# Altium PCB Output.PcbDoc
Units mil, origin at the board's own origin, x right, y up, seen from the top; angles counter-clockwise.
Board outline 6299.21 x 3937.01 mil, 2 copper layers (Top Layer, Bottom Layer); 99 components, 62 nets, 304 pads, 98 vias.
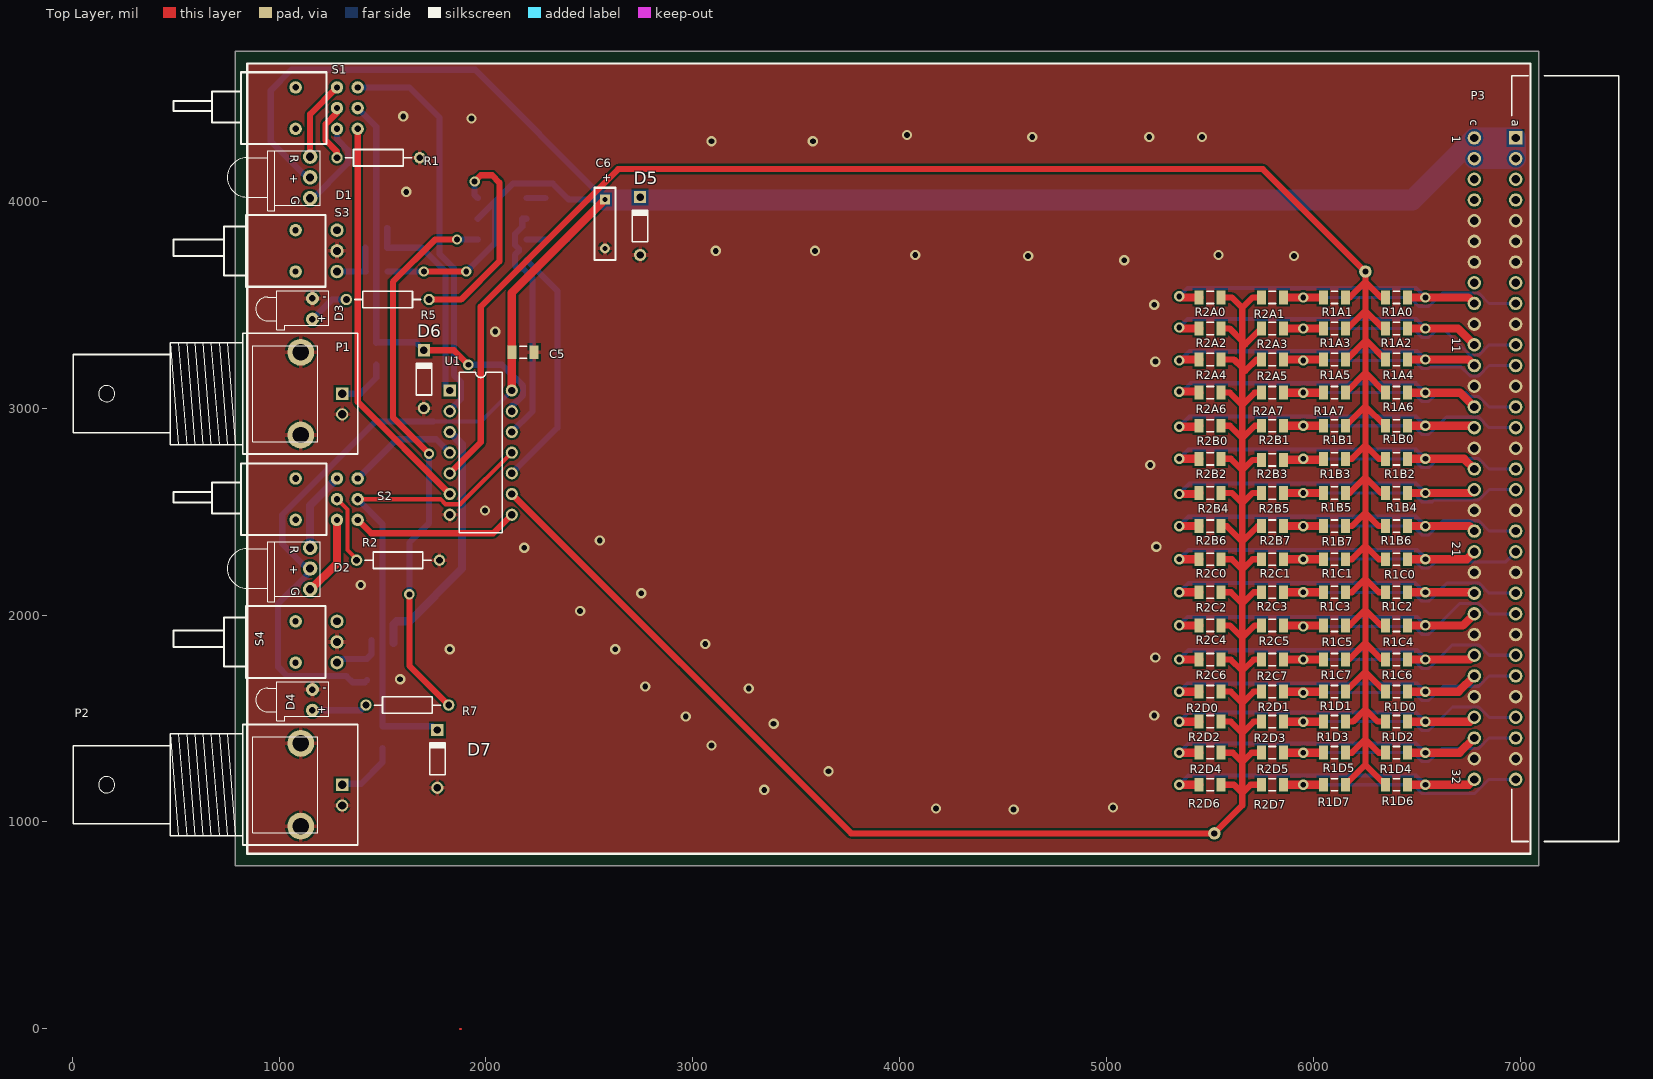
[diagram p0: Top Layer view]
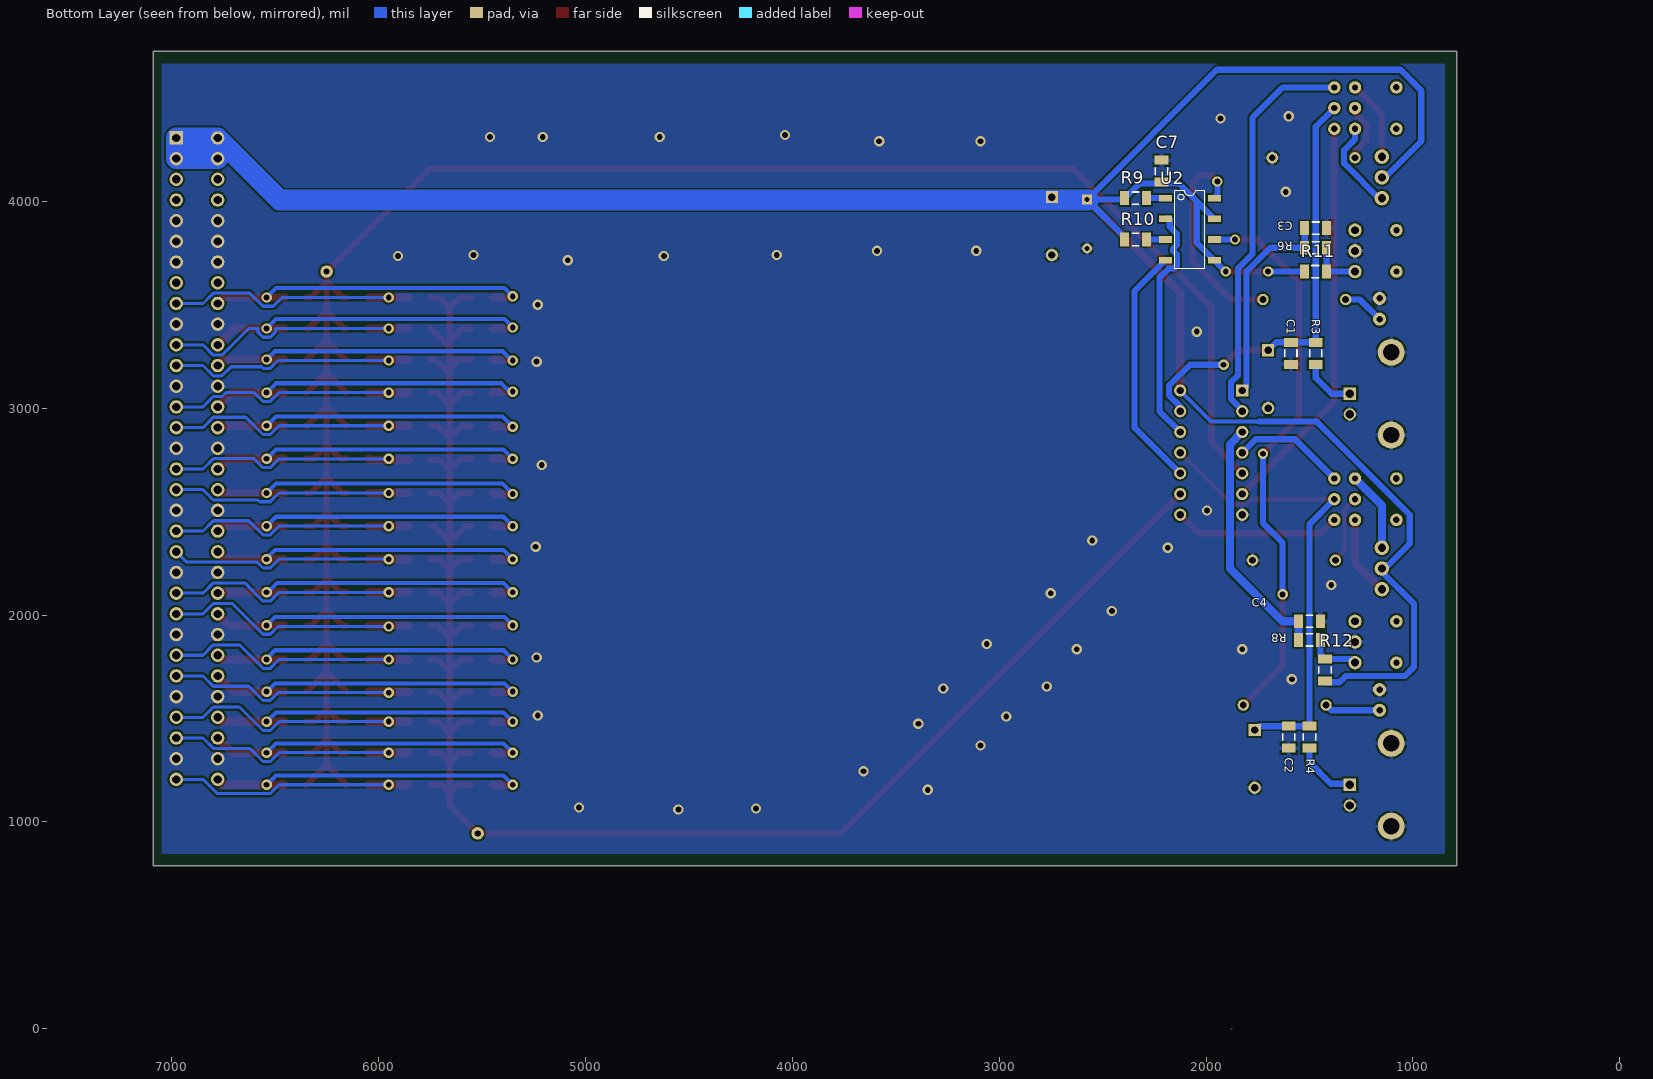
[diagram p1: Bottom Layer view, seen from below]

## Layer stack, top to bottom
Top Solder: solder mask 0.4, Solder Resist, Dk 3.5
Top Layer: signal copper 1.4
Dielectric1: dielectric 12.6, FR-4, Dk 4.8
Bottom Layer: signal copper 1.4
Bottom Solder: solder mask 0.4, Solder Resist, Dk 3.5

## Board outline
787.4,787.4 7086.61,787.4 7086.61,4724.41 787.4,4724.41

## Design rules (kind name [scope] priority, off if disabled: settings)
Clearance [All] p1: gap=10 ignorepadtopadclearanceinfootprint=FALSE except(0: Arc-Hole Track-Hole SMDPad-Hole THPad-Hole Via-Hole Fill-Hole Poly-Hole Region-Hole Text-Hole)
PlaneConnect PlaneConnect_1 [All] p1: planeconnectstyle=Relief reliefexpansion=20 reliefentries=4 reliefconductorwidth=10 reliefairgap=10
PolygonConnect PolygonConnect_1 [All vs (InComponent('P3') OR ISVia)] p1: connectstyle=Direct reliefconductorwidth=10 reliefentries=4 polygonreliefangle="90 Angle" airgapwidth=10
PolygonConnect [All] p2: connectstyle=Relief reliefconductorwidth=20 reliefentries=4 polygonreliefangle="90 Angle" airgapwidth=10
RoutingVias [All] p1: holewidth=28 width=50 viastyle="Through Hole" minholewidth=28 minwidth=50 maxholewidth=28 maxwidth=50
SilkToSolderMaskClearance SilkscreenOverComponentPads [IsPad] p1: minsilkscreentomaskgap=10 clearancetoexposedcopper=TRUE
SolderMaskExpansion [All] p1: expansion=4 istentingtop=FALSE
Width [All] p1: maxlimit=100 minlimit=10 preferedwidth=30
28 further rules are at their usual default settings.

## Components (designator, comment, footprint, x,y, rotation, side; value= is the part's Value field where it differs from the comment)
C1 "Cap Semi" C1206 1590,3265 r270 bottom value=100pF
C2 "Cap Semi" C1206 1600,1410 r270 bottom value=100pF
C3 "Cap Semi" C1206 1470,3870 r0 bottom value=100nF
C4 "Cap Semi" C1206 1500,1970 r0 bottom value=100nF
C5 "Cap Semi" C1206 2180,3270 r180 top value=100nF
C6 "Cap Pol1" Captantalum 2575,3890 r90 top value=10uF
C7 "Cap Semi" C1206 2215,4145 r270 bottom value=100nF
D1 "MV5439A" "Double LED" 1150,4115 r270 top
D2 "MV5439A" "Double LED" 1150,2225 r270 top
D3 "HLMP-EJ30-NR0DD" LED-A 1161.42,3480 r180 top
D4 "HLMP-EJ30-NR0DD" LED-A 1161.42,1590 r180 top
D5 "Zener Diode BZX79C5V6" DO-35 2745,3880 r90 top
D6 "Zener Diode BZX79C5V6" DO-35 1700,3140 r90 top
D7 "Zener Diode BZX79C5V6" DO-35 1765,1305 r90 top
P1 "BNC" "BNC_RA CON" 1305,3070 r0 top
P2 "BNC" "BNC_RA CON" 1305,1180 r0 top
P3 "HARTING 09031642921" EURO2.54-2H64-NH 7185.04,2755.91 r270 top
R1 "Res1" AXIAL-0.4 1480,4210 r180 top value=150
R1A0 "Res1" C1206 6400,3535 r180 top value=0
R1A1 "Res1" C1206 6100,3535 r180 top value=0
R1A2 "Res1" C1206 6400,3385 r180 top value=0
R1A3 "Res1" C1206 6100,3385 r180 top value=0
R1A4 "Res1" C1206 6400,3235 r180 top value=0
R1A5 "Res1" C1206 6100,3235 r180 top value=0
R1A6 "Res1" C1206 6400,3075 r180 top value=0
R1A7 "Res1" C1206 6100,3075 r180 top value=0
R1B0 "Res1" C1206 6400,2915 r180 top value=0
R1B1 "Res1" C1206 6100,2915 r180 top value=0
R1B2 "Res1" C1206 6400,2755 r180 top value=0
R1B3 "Res1" C1206 6100,2755 r180 top value=0
R1B4 "Res1" C1206 6400,2590 r180 top value=0
R1B5 "Res1" C1206 6100,2590 r180 top value=0
R1B6 "Res1" C1206 6400,2430 r180 top value=0
R1B7 "Res1" C1206 6100,2430 r180 top value=0
R1C0 "Res1" C1206 6400,2270 r180 top value=0
R1C1 "Res1" C1206 6100,2270 r180 top value=0
R1C2 "Res1" C1206 6400,2110 r180 top value=0
R1C3 "Res1" C1206 6100,2110 r180 top value=0
R1C4 "Res1" C1206 6400,1950 r180 top value=0
R1C5 "Res1" C1206 6100,1950 r180 top value=0
R1C6 "Res1" C1206 6400,1785 r180 top value=0
R1C7 "Res1" C1206 6100,1785 r180 top value=0
R1D0 "Res1" C1206 6400,1630 r180 top value=0
R1D1 "Res1" C1206 6100,1630 r180 top value=0
R1D2 "Res1" C1206 6400,1485 r180 top value=0
R1D3 "Res1" C1206 6100,1485 r180 top value=0
R1D4 "Res1" C1206 6400,1335 r180 top value=0
R1D5 "Res1" C1206 6100,1335 r180 top value=0
R1D6 "Res1" C1206 6400,1180 r180 top value=0
R1D7 "Res1" C1206 6100,1180 r180 top value=0
R2 "Res1" AXIAL-0.4 1575,2265 r180 top value=150
R2A0 "Res1" C1206 5500,3535 r0 top value=0
R2A1 "Res1" C1206 5800,3535 r0 top value=0
R2A2 "Res1" C1206 5500,3385 r0 top value=0
R2A3 "Res1" C1206 5800,3385 r0 top value=0
R2A4 "Res1" C1206 5500,3235 r0 top value=0
R2A5 "Res1" C1206 5800,3235 r0 top value=0
R2A6 "Res1" C1206 5500,3075 r0 top value=0
R2A7 "Res1" C1206 5800,3075 r0 top value=0
R2B0 "Res1" C1206 5500,2915 r0 top value=0
R2B1 "Res1" C1206 5800,2915 r0 top value=0
R2B2 "Res1" C1206 5500,2755 r0 top value=0
R2B3 "Res1" C1206 5800,2750 r0 top value=0
R2B4 "Res1" C1206 5500,2590 r0 top value=0
R2B5 "Res1" C1206 5800,2590 r0 top value=0
R2B6 "Res1" C1206 5500,2430 r0 top value=0
R2B7 "Res1" C1206 5800,2430 r0 top value=0
R2C0 "Res1" C1206 5500,2270 r0 top value=0
R2C1 "Res1" C1206 5800,2270 r0 top value=0
R2C2 "Res1" C1206 5500,2110 r0 top value=0
R2C3 "Res1" C1206 5800,2110 r0 top value=0
R2C4 "Res1" C1206 5500,1950 r0 top value=0
R2C5 "Res1" C1206 5800,1950 r0 top value=0
R2C6 "Res1" C1206 5500,1785 r0 top value=0
R2C7 "Res1" C1206 5800,1785 r0 top value=0
R2D0 "Res1" C1206 5500,1630 r0 top value=0
R2D1 "Res1" C1206 5800,1630 r0 top value=0
R2D2 "Res1" C1206 5500,1485 r0 top value=0
R2D3 "Res1" C1206 5800,1485 r0 top value=0
R2D4 "Res1" C1206 5500,1335 r0 top value=0
R2D5 "Res1" C1206 5800,1335 r0 top value=0
R2D6 "Res1" C1206 5500,1180 r0 top value=0
R2D7 "Res1" C1206 5800,1180 r0 top value=0
R3 "Res1" C1206 1470,3265 r90 bottom value=50
R4 "Res1" C1206 1500,1410 r90 bottom value=50
R5 "Res1" AXIAL-0.4 1525,3525 r0 top value=150
R6 "Res1" C1206 1470,3775 r0 bottom value=100K
R7 "Res1" AXIAL-0.4 1620,1565 r0 top value=150
R8 "Res1" C1206 1500,1880 r0 bottom value=100K
R9 "Res" 1206 2340,4015 r180 bottom value=750
R10 "Res" 1206 2340,3815 r180 bottom value=750
R11 "Res1" C1206 1471.85,3660 r0 bottom value=10K
R12 "Res1" C1206 1425,1735 r270 bottom value=10K
S1 "SW-DPDT-NKKB22JH" NKK22 1280,4450 r0 top
S2 "SW-DPDT-NKKB22JH" NKK22 1280,2560 r0 top
S3 "SW-SPDT" NKK12 1280,3760 r0 top
S4 "SW-SPDT" NKK12 1280,1870 r0 top
U1 "SN74HC14N" N014 1975,2785 r270 top
U2 "AQW210S" SOP8 2196.22,4015 r180 bottom

## Footprints (in the part's own frame and the unit in brackets; to place one, negate y for a bottom-side part, rotate by r counter-clockwise, add the part's x,y. Pads: shape width x height; smd on the part's side, far side on the other; paste and mask are expansions set on the pad)
1206 [mm] "Chip Capacitor, Body 3.2x1.6mm, IPC High Density"
  rect 1.1x1.7 smd: 1(-1.35,0) 2(1.35,0)
  silkscreen extent -0.4,-0.75 0.4,0.75, body extent -1.7,-0.9 1.7,0.9, height 1.3
AXIAL-0.4 [mm] "Axial Device, Thru-Hole; 2 Leads; 0.4 in Pin Spacing"
  round 1.4 hole 0.85: 1(-5.08,0) 2(5.08,0)
  silkscreen extent -4.06,-1.02 4.06,1.02
"BNC_RA CON" [mm] "Connector; BNC Elbow"
  rect 1.5x1.5 hole 1.016: 1(0,0)
  round 3.3 hole 2.01: 2(-5.08,-5.08) 2(-5.08,5.08)
  round 1.5 hole 1.016: 2(0,-2.54)
  silkscreen extent -33,-7.4 1.9,7.4
C1206 [mm] "Chip Capacitor, Body 3.2x1.6mm, IPC High Density"
  rect 1.1x1.7 smd: 1(-1.35,0) 2(1.35,0)
  silkscreen extent -0.4,-0.75 0.4,0.75, body extent -1.7,-0.9 1.7,0.9, height 1.3
Captantalum [mm] "Polarized Capacitor (Radial); 2 Leads"
  rect 1.2x1.2 hole 0.6: 1(3,0)
  round 1.2 hole 0.6: 2(-3,0)
  silkscreen extent -4.44,-1.27 4.44,1.27
DO-35 [mm] "Diode, Axial; Body 3.8 x 1.9 mm (LxDia. max), Lead Dia. 0.53 mm (max)"
  round 1.5 hole 0.9: 1(-3.55,0)
  rect 1.5x1.5 hole 0.9: 2(3.55,0)
  silkscreen extent -1.95,-0.95 2.05,0.95
"Double LED" [mil] "LED; 2 Leads"
  round 70 hole 40: 1(-100,0) 2(0,0) 3(100,0)
  silkscreen extent -130,-400 160,50
EURO2.54-2H64-NH [mm] "Connector; DIN 41612, Type C, Thru-Hole; Rows a+c, 64 Position; Right Angle"
  rect 1.65x1.65 hole 1: A1(-39.37,-5.3)
  round 1.65 hole 1: A2(-36.83,-5.3) A3(-34.29,-5.3) A4(-31.75,-5.3) A5(-29.21,-5.3) A6(-26.67,-5.3) A7(-24.13,-5.3) A8(-21.59,-5.3) A9(-19.05,-5.3) A10(-16.51,-5.3) A11(-13.97,-5.3) A12(-11.43,-5.3) A13(-8.89,-5.3) A14(-6.35,-5.3) A15(-3.81,-5.3) A16(-1.27,-5.3) A17(1.27,-5.3) A18(3.81,-5.3) A19(6.35,-5.3) A20(8.89,-5.3) A21(11.43,-5.3) A22(13.97,-5.3) A23(16.51,-5.3) A24(19.05,-5.3) A25(21.59,-5.3) A26(24.13,-5.3) A27(26.67,-5.3) A28(29.21,-5.3) A29(31.75,-5.3) A30(34.29,-5.3) A31(36.83,-5.3) A32(39.37,-5.3) C1(-39.37,-10.38) C2(-36.83,-10.38) C3(-34.29,-10.38) C4(-31.75,-10.38) C5(-29.21,-10.38) C6(-26.67,-10.38) C7(-24.13,-10.38) C8(-21.59,-10.38) C9(-19.05,-10.38) C10(-16.51,-10.38) C11(-13.97,-10.38) C12(-11.43,-10.38) C13(-8.89,-10.38) C14(-6.35,-10.38) C15(-3.81,-10.38) C16(-1.27,-10.38) C17(1.27,-10.38) C18(3.81,-10.38) C19(6.35,-10.38) C20(8.89,-10.38) C21(11.43,-10.38) C22(13.97,-10.38) C23(16.51,-10.38) C24(19.05,-10.38) C25(21.59,-10.38) C26(24.13,-10.38) C27(26.67,-10.38) C28(29.21,-10.38) C29(31.75,-10.38) C30(34.29,-10.38) C31(36.83,-10.38) C32(39.37,-10.38)
  silkscreen extent -47,-5.8 47,7.34, body extent -47,-5.8 47,7.34, height 11.1
LED-A [mm]
  round 1.6 hole 0.8: 1(0,1.27) 2(0,-1.27)
  silkscreen extent -2,-2.2 6.95,2.54
N014 [mm] "DIP; 14 Leads; Row Spacing 7.62 mm; Pitch 2.54 mm"
  rect 1.5x1.5 hole 0.9: 1(-7.62,-3.81)
  round 1.5 hole 0.9: 2(-5.08,-3.81) 3(-2.54,-3.81) 4(0,-3.81) 5(2.54,-3.81) 6(5.08,-3.81) 7(7.62,-3.81) 8(7.62,3.81) 9(5.08,3.81) 10(2.54,3.81) 11(0,3.81) 12(-2.54,3.81) 13(-5.08,3.81) 14(-7.62,3.81)
  silkscreen extent -9.85,-2.65 9.85,2.65
NKK12 [mil]
  round 65 hole 38: 1(0,100) 2(0,0) 3(0,-100)
  round 60 hole 30: M(-200,-100) M(-200,100)
  silkscreen extent -790,-173 -55,173
NKK22 [mil]
  round 60 hole 30: 1(0,0) 2(0,100) 3(0,-100) 4(100,0) 5(100,100) 6(100,-100)
  round 60 hole 31.5: M(-200,-100) M(-200,100)
  silkscreen extent -790,-173 -51,173
SOP8 [mm]
  rect 1.6x0.8 smd: 1(0,0) 2(0,-2.54) 3(0,-5.08) 4(0,-7.62) 5(6,-7.62) 6(6,-5.08) 7(6,-2.54) 8(6,0)
  silkscreen extent 1.14,-8.7 4.83,0.9

## Part data
C1 C2 C3 C4 C5 C7: "Capacitor (Semiconductor SIM Model)", LatestRevisionDate=29-May-2009, LatestRevisionNote="IPC-7351 Footprint Added.", PackageDescription="Chip Capacitor", PackageReference=C1206, Published=8-Jun-2000, Publisher="Altium Limited"
C6: "Polarized Capacitor (Radial)", LatestRevisionDate=17-Jul-2002, LatestRevisionNote="Re-released for DXP Platform.", PackageDescription="Polarized Capacitor (Radial); 2 Leads", PackageReference=RB7.6-15, Published=8-Jun-2000, Publisher="Altium Limited"
D1 D2: library part "Double LED", "Double LED", LatestRevisionDate=08-Jul-2005, LatestRevisionNote="Mech Layer 1 removed.", PackageDescription="LED; 2 Leads", PackageReference=LED-0, Published=8-Jun-2000, Publisher="Altium Limited"
D3 D4: library part LED0, "LED", LatestRevisionDate=08-Jul-2005, LatestRevisionNote="Mech Layer 1 removed.", PackageDescription="LED; 2 Leads", PackageReference=LED-0, Published=8-Jun-2000, Publisher="Altium Limited"
D5 D6 D7: library part "Diode 1N914", "High Conductance Fast Diode", Code_JEDEC=DO-204-AH, ComponentLink1Description="Manufacturer Link", ComponentLink1URL=http://www.fairchildsemi.com/, ComponentLink2Description=Datasheet, ComponentLink2URL=http://www.fairchildsemi.com/ds/1N%2F1N4448.pdf, DatasheetVersion=1997, LatestRevisionDate=17-Jul-2002, LatestRevisionNote="Re-released for DXP Platform.", PackageDescription="Diode, Axial; Body 3.8 x 1.9 mm (LxDia. max), Lead Dia. 0.53 mm (max)", PackageReference=DO-35, Published=8-Jun-2000, Publisher="Altium Limited"
P1 P2: "BNC Vertical Connector", LatestRevisionDate=17-Jul-2002, LatestRevisionNote="Re-released for DXP Platform.", Publisher="Altium Limited"
P3: library part "Din 41612 64NH", "DIN 41612"
R1 R1A0 R1A1 R1A2 R1A3 R1A4 R1A5 R1A6 R1A7 R1B0 R1B1 R1B2 R1B3 R1B4 R1B5 R1B6 R1B7 R1C0 R1C1 R1C2 R1C3 R1C4 R1C5 R1C6 R1C7 R1D0 R1D1 R1D2 R1D3 R1D4 R1D5 R1D6 R1D7 R2 R2A0 R2A1 R2A2 R2A3 R2A4 R2A5 R2A6 R2A7 R2B0 R2B1 R2B2 R2B3 R2B4 R2B5 R2B6 R2B7 R2C0 R2C1 R2C2 R2C3 R2C4 R2C5 R2C6 R2C7 R2D0 R2D1 R2D2 R2D3 R2D4 R2D5 R2D6 R2D7 R3 R4 R5 R6 R7 R8 R11 R12: "Resistor", LatestRevisionDate=17-Jul-2002, LatestRevisionNote="Re-released for DXP Platform.", PackageDescription="Axial Device, Thru-Hole; 2 Leads; 0.3 in Pin Spacing", PackageReference=AXIAL-0.3, Published=8-Jun-2000, Publisher="Altium Limited"
R9 R10: library part Res_SM, "Resistor", LatestRevisionDate=29-May-2009, LatestRevisionNote="IPC-7351 Footprint Added.", PackageDescription="Chip Resistor", PackageReference=J1-0603, Published=8-Jun-2000, Publisher="Altium Limited"
S1 S2: library part SW-DPDT-NKK, "Double-Pole, Double-Throw Switch", LatestRevisionDate=17-Jul-2002, LatestRevisionNote="Re-released for DXP Platform.", PackageDescription="Switch; 6 Leads", PackageReference=DPDT-6, Published=24-Mar-1999, Publisher="Altium Limited"
S3 S4: "SPDT Subminiature Toggle Switch, Right Angle Mounting, Vertical Actuation", ComponentLink1Description="Manufacturer Link", ComponentLink1URL=http://www.apem.com, DatasheetVersion=05-Dec-2000, LatestRevisionDate=17-Dec-2003, LatestRevisionNote="Schematic revised, PCB Footprint replaced.", PackageDescription="Switch; 4 Leads", PackageReference=TL36WW15050, Published=24-Mar-1999, Publisher="Altium Limited"
U1: "Hex Schmitt-Trigger Inverter", ComponentLink1Description="Manufacturer Link", ComponentLink1URL=http://www.ti.com/, ComponentLink2Description=Datasheet, ComponentLink2URL=http://www-s.ti.com/sc/ds/sn74hc14.pdf, DatasheetVersion=May-1997, LatestRevisionDate=04-Mar-2005, LatestRevisionNote="Stylized 3D Model Added.", PackageDescription="DIP; 14 Leads; Row Spacing 7.62 mm; Pitch 2.54 mm", PackageReference=N014, PackageVersion=Oct-1995, Published=8-Jun-2000, Publisher="Altium Limited"
U2: library part AQW210SX

## Free pads (board coordinates)
  round 60 hole 30: 0(5520,945) 1(6250,3660)

## Via types
v1: diameter 50, hole 28, Top Layer to Bottom Layer, 98 vias

## Nets (pads, with @x,y where several pads share a name; then routed paths per layer and width w, separated by ;. In a path a pad name is that pad's centre, name@x,y a point inside that pad or via, vN(x,y) a via of type N, cw(c..) or ccw(c..) an arc to the next point about the centre after c; other vN are vias at no path point)
+5V: C5.2 C6.1 C7.2 D1.2 D2.2 D5.2 P3.A1 P3.A2 P3.C1 P3.C2 R9.1 R10.1 R11.2 R12.2 U1.14 U2.5 U2.7 | length 12914
  Top Layer w30: v1(1700,3660) v1(1905,3660)
  Top Layer w40: U1.14 2125,3558.11 C6.1
  Bottom Layer w20: 1745,2935 1975,2935 U1.14 U1.14@2140,3085
  Bottom Layer w30: D1.2@1150,4100 960,4290 960,4535 1060,4635 1948.11,4635 C6.1 ; R12.2@1425,1685 1415,1675 1355,1675 1325,1705 1040,1705 995,1750 995,2055 1150,2210 1015,2345 1015,2485 1465,2935 1745,2935 ; R11.2 v1(1700,3660) ; v1(1905,3660) U2.5 2045,3800 2045,4000 ; U2.7 2045,4000 ; R10.1 2393.15,3826.26 2572.8,4005.91 C6.1 ; 2045,4000 2130,4085 2323.15,4085 R9.1 2400.04,4008.11 C6.1
  Bottom Layer w100: C6.1@2569.09,4005.91 2572.8,4005.91 6476.38,4005.91 P3.C1 P3.A1 P3.A2 P3.C2 6776.38,4286.38 P3.C1@6780,4290
A0: P3.C9 R1A0.1 R2A0.1 | length 1660.7
  Top Layer w40: v1(5350,3540) 5355,3535 R2A0.1 ; R1A0.1@6454.06,3535.91 R1A0.1 v1(6540,3535) 6747.28,3535 P3.C9
  Bottom Layer w20: v1(5350,3540) 5390,3580 6495,3580 v1(6540,3535)
A1: P3.A9 R1A1.2 R2A1.2 | length 1284.6
  Top Layer w40: R2A1.2 v1(5950,3535) R1A1.2
  Bottom Layer w15: v1(5950,3535) 6465,3535 6507.5,3492.5 6557.6,3492.5 6620.99,3555.89 6797.08,3555.89 6847.06,3505.91 P3.A9
A2: P3.C11 R1A2.1 R2A2.1 | length 1680.1
  Top Layer w40: v1(5350,3390) 5355,3385 R2A2.1 ; R1A2.1 v1(6540,3385) 6697.28,3385 P3.C11
  Bottom Layer w20: v1(5350,3390) 5390,3430 6495,3430 v1(6540,3385)
A3: P3.A11 R1A3.2 R2A3.2 | length 1350.1
  Top Layer w40: R2A3.2 v1(5950,3385) R1A3.2
  Bottom Layer w15: v1(5950,3385) 6497.5,3385 6497.5,3367.4 6522.4,3342.5 6557.6,3342.5 6582.5,3367.4 6582.5,3385 6626.6,3385 6755.68,3255.93 6797.08,3255.93 6847.06,3305.91 P3.A11
A4: P3.C12 R1A4.1 R2A4.1 | length 1659.4
  Top Layer w40: v1(5350,3230) 5355,3235 R2A4.1 ; R1A4.1 v1(6540,3235) 6747.28,3235 P3.C12
  Bottom Layer w20: v1(5350,3230) 5355,3230 5400,3275 6500,3275 v1(6540,3235)
A5: P3.A12 R1A5.2 R2A5.2 | length 1277.7
  Top Layer w40: R2A5.2 R1A5.2
  Bottom Layer w15: v1(5950,3230) 6484.9,3230 6522.4,3192.5 6557.6,3192.5 6565.1,3200 6711.6,3200 6755.68,3155.93 6797.08,3155.93 6847.06,3205.91 P3.A12
A6: P3.C14 R1A6.1 R2A6.1 | length 1676
  Top Layer w40: v1(5350,3080) 5441.85,3080 R2A6.1 ; R1A6.1 v1(6540,3075) 6707.28,3075 P3.C14
  Bottom Layer w20: v1(5350,3080) 5365,3080 5405,3120 6495,3120 v1(6540,3075)
A7: P3.A14 R1A7.2 R2A7.2 | length 1283.9
  Top Layer w40: R2A7.2 v1(5950,3075) R1A7.2
  Bottom Layer w15: v1(5950,3075) 6479.9,3075 6522.4,3032.5 6557.6,3032.5 6600.05,3074.95 6600.05,3075 6736.56,3075 6755.68,3055.89 6797.08,3055.89 6847.06,3005.91 P3.A14
B0: P3.C15 R1B0.1 R2B0.1 | length 1655.3
  Top Layer w40: v1(5350,2910) 5441.85,2910 R2B0.1 ; R1B0.1 v1(6540,2915) 6767.28,2915 P3.C15
  Bottom Layer w20: v1(5350,2910) 5400,2960 6495,2960 v1(6540,2915)
B1: P3.A15 R1B1.2 R2B1.2 | length 1292.9
  Top Layer w40: R2B1.2 v1(5950,2915) R1B1.2
  Bottom Layer w15: v1(5950,2915) 6479.9,2915 6522.4,2872.5 6557.6,2872.5 6640.99,2955.89 6797.08,2955.89 6847.06,2905.91 P3.A15
B2: P3.C17 R1B2.1 R2B2.1 | length 1667.7
  Top Layer w40: v1(5350,2755) R2B2.1 ; R1B2.1 v1(6540,2755) 6727.28,2755 P3.C17
  Bottom Layer w20: v1(5350,2755) 5395,2800 6495,2800 v1(6540,2755)
B3: P3.A17 R1B3.2 R2B3.2 | length 1278.4
  Top Layer w40: R2B3.2 6041.85,2750 R1B3.2
  Bottom Layer w15: v1(5950,2755) 6479.9,2755 6522.4,2712.5 6557.6,2712.5 6600.99,2755.89 6797.08,2755.89 6847.06,2705.91 P3.A17
B4: P3.C18 R1B4.1 R2B4.1 | length 1658.1
  Top Layer w40: v1(5350,2585) 5441.85,2585 R2B4.1 ; R1B4.1 v1(6540,2590) 6760.47,2590 P3.C18
  Bottom Layer w20: v1(5350,2585) 5400,2635 6495,2635 v1(6540,2590)
B5: P3.A18 R1B5.2 R2B5.2 | length 1261.9
  Top Layer w40: R2B5.2 v1(5950,2590) R1B5.2
  Bottom Layer w15: v1(5950,2590) 6479.9,2590 6522.4,2547.5 6574.07,2547.5 6582.5,2555.93 6797.08,2555.93 6847.06,2605.91 P3.A18
B6: P3.C20 R1B6.1 R2B6.1 | length 1657.3
  Top Layer w40: v1(5350,2430) R2B6.1 ; R1B6.1 v1(6540,2430) 6752.28,2430 P3.C20
  Bottom Layer w20: v1(5350,2430) 5395,2475 6495,2475 v1(6540,2430)
B7: P3.A20 R1B7.2 R2B7.2 | length 1286.7
  Top Layer w40: R2B7.2 v1(5950,2430) R1B7.2
  Bottom Layer w15: v1(5950,2430) 6479.9,2430 6522.4,2387.5 6557.6,2387.5 6625.99,2455.89 6797.08,2455.89 6847.06,2405.91 P3.A20
C0: P3.C21 R1C0.1 R2C0.1 | length 1665.2
  Top Layer w40: v1(5350,2270) R2C0.1 ; R1C0.1 v1(6540,2270) 6740.47,2270 P3.C21
  Bottom Layer w20: v1(5350,2270) 5395,2315 6500,2315 6540,2275 v1(6540,2270)
C1: P3.A21 R1C1.2 R2C1.2 | length 1270.2
  Top Layer w40: R2C1.2 v1(5950,2270) R1C1.2
  Bottom Layer w15: v1(5950,2270) 6479.9,2270 6522.4,2227.5 6557.6,2227.5 6586.03,2255.93 6926.4,2255.93 P3.A21
C2: P3.C23 R1C2.1 R2C2.1 | length 1649.1
  Top Layer w40: v1(5350,2110) R2C2.1 ; R1C2.1 v1(6540,2110) 6772.28,2110 P3.C23
  Bottom Layer w20: v1(5350,2110) 5395,2155 6490,2155 6535,2110 v1(6540,2110)
C3: P3.A23 R1C3.2 R2C3.2 | length 1295
  Top Layer w40: R2C3.2 v1(5950,2110) R1C3.2
  Bottom Layer w15: v1(5950,2110) 6479.9,2110 6522.4,2067.5 6557.6,2067.5 6645.99,2155.89 6797.08,2155.89 6847.06,2105.91 P3.A23
C4: P3.C24 R1C4.1 R2C4.1 | length 1666.4
  Top Layer w40: v1(5350,1950) R2C4.1 ; R1C4.1 v1(6540,1950) 6720.47,1950 P3.C24
  Bottom Layer w20: v1(5350,1950) 5390,1990 6500,1990 v1(6540,1950)
C5: P3.A24 R1C5.2 R2C5.2 | length 1317.8
  Top Layer w40: R2C5.2 R1C5.2
  Bottom Layer w15: v1(5950,1945) 6484.9,1945 6522.4,1907.5 6557.6,1907.5 6705.99,2055.89 6797.08,2055.89 6847.06,2005.91 P3.A24
C6: P3.C26 R1C6.1 R2C6.1 | length 1658.9
  Top Layer w40: v1(5350,1785) R2C6.1 ; R1C6.1 v1(6540,1785) 6755.47,1785 P3.C26
  Bottom Layer w20: v1(5350,1785) 5395,1830 6500,1830 6540,1790 v1(6540,1785)
C7: P3.A26 R1C7.2 R2C7.2 | length 1305.4
  Top Layer w40: R2C7.2 v1(5950,1785) R1C7.2
  Bottom Layer w15: v1(5950,1785) 6479.9,1785 6522.4,1742.5 6557.6,1742.5 6670.99,1855.89 6797.08,1855.89 6847.06,1805.91 P3.A26
D0: P3.C27 R1D0.1 R2D0.1 | length 1674.7
  Top Layer w40: v1(5350,1630) R2D0.1 ; R1D0.1 v1(6540,1630) 6700.47,1630 P3.C27
  Bottom Layer w20: v1(5350,1630) 5390,1670 6500,1670 v1(6540,1630)
D1: P3.A27 R1D1.2 R2D1.2 | length 1284.7
  Top Layer w40: R2D1.2 R1D1.2
  Bottom Layer w15: v1(5950,1625) 6484.9,1625 6522.4,1587.5 6557.6,1587.5 6626.03,1655.93 6797.08,1655.93 6847.06,1705.91 P3.A27
D2: P3.C29 R1D2.1 R2D2.1 | length 1656
  Top Layer w40: v1(5350,1485) R2D2.1 ; R1D2.1 v1(6540,1485) 6755.47,1485 P3.C29
  Bottom Layer w20: v1(5350,1485) 5395,1530 6495,1530 v1(6540,1485)
D3: P3.A29 R1D3.2 R2D3.2 | length 1305.4
  Top Layer w40: R2D3.2 v1(5950,1485) R1D3.2
  Bottom Layer w15: v1(5950,1485) 6479.9,1485 6522.4,1442.5 6557.6,1442.5 6670.99,1555.89 6797.08,1555.89 6847.06,1505.91 P3.A29
D4: P3.C30 R1D4.1 R2D4.1 | length 1676.7
  Top Layer w40: v1(5350,1335) R2D4.1 ; R1D4.1 v1(6540,1335) 6705.47,1335 P3.C30
  Bottom Layer w20: v1(5350,1335) 5395,1380 6495,1380 v1(6540,1335)
D5: P3.A30 R1D5.2 R2D5.2 | length 1284.7
  Top Layer w40: R2D5.2 v1(5950,1335) R1D5.2
  Bottom Layer w15: v1(5950,1335) 6479.9,1335 6522.4,1292.5 6557.6,1292.5 6621.03,1355.93 6797.08,1355.93 6847.06,1405.91 P3.A30
D6: P3.C32 R1D6.1 R2D6.1 | length 1658.1
  Top Layer w40: v1(5350,1180) R2D6.1 ; R1D6.1 v1(6540,1180) 6750.47,1180 P3.C32
  Bottom Layer w20: v1(5350,1180) 5395,1225 6495,1225 v1(6540,1180)
D7: P3.A32 R1D7.2 R2D7.2 | length 1266
  Top Layer w40: R2D7.2 v1(5950,1180) R1D7.2
  Bottom Layer w15: v1(5950,1180) 6479.9,1180 6522.4,1137.5 6778.66,1137.5 6847.06,1205.91 P3.A32
Digital1: S1.6 U1.6 | length 1949.3
  Top Layer w30: S1.6 1380,3030 U1.6
Digital1_inv: pad.1 R1A0.2 R1A1.1 R1A2.2 R1A3.1 R1A4.2 R1A5.1 R1A6.2 R1A7.1 R1B0.2 R1B1.1 R1B2.2 R1B3.1 R1B4.2 R1B5.1 R1B6.2 R1B7.1 R1C0.2 R1C1.1 R1C2.2 R1C3.1 R1C4.2 R1C5.1 R1C6.2 R1C7.1 R1D0.2 R1D1.1 R1D2.2 R1D3.1 R1D4.2 R1D5.1 R1D6.2 R1D7.1 U1.5 | length 12139.9
  Top Layer w30: U1.5 1975,2835 1975,3490.71 2639.29,4155 5755,4155 pad.1 6250,3610 ; R1D7.1 6250,1276.85 ; R1D5.1 6185,1335 6250,1400 ; R1D3.1 6190,1485 6250,1545 ; R1D1.1 6250,1726.85 ; R1C7.1 6170,1785 6250,1865 ; R1C5.1 6175,1950 6250,2025 ; R1C3.1 6185,2110 6250,2175 ; R1C1.1 6185,2270 6250,2335 ; R1B7.1 6185,2430 6250,2495 ; R1B5.1 6175,2590 6250,2665 ; R1B3.1 6185,2755 6250,2820 ; R1B1.1 6155,2915 6250,3010 ; R1A7.1 6155,3075 6250,3170 ; R1A5.1 6160,3235 6250,3325 ; R1A3.1 6165,3385 6250,3470 ; R1A1.1 6175,3535 6250,3610 ; R1D6.2 6250,1276.85 ; R1D4.2 6315,1335 6250,1400 ; R1D2.2 6310,1485 6250,1545 ; R1D0.2 6250,1726.85 ; R1C6.2 6330,1785 6250,1865 ; R1C4.2 6325,1950 6250,2025 ; R1C2.2 6315,2110 6250,2175 ; R1C0.2 6315,2270 6250,2335 ; R1B6.2 6315,2430 6250,2495 ; R1B4.2 6325,2590 6250,2665 ; R1B2.2 6315,2755 6250,2820 ; R1B0.2 6345,2915 6250,3010 ; R1A6.2 6251.85,3170 6250,3170 ; R1A4.2 6256.85,3325 6250,3325 ; R1A2.2 6335,3385 6250,3470 ; R1A0.2 6325,3535 6250,3610 ; 6250,1276.85 6250,1400 ; 6250,1400 6250,1545 ; 6250,1545 6250,1726.85 ; 6250,1726.85 6250,1865 ; 6250,1865 6250,2025 ; 6250,2025 6250,2175 ; 6250,2175 6250,2335 ; 6250,2335 6250,2495 ; 6250,2495 6250,2665 ; 6250,2665 6250,2820 ; 6250,2820 6250,3010 ; 6250,3010 6250,3170 ; 6250,3170 6250,3325 ; 6250,3325 6250,3470 ; 6250,3470 6250,3610
Digital1_LED: U1.12 U2.2 | length 1174.1
  Bottom Layer w30: U1.12 2225,2985 2225,3629.65 2180.4,3674.25 2154.37,3674.25 2139.72,3688.9 2139.72,3741.1 2159.34,3760.71 2159.34,3769.29 2139.72,3788.9 2139.72,3841.1 2175,3876.38 2175,3915 U2.2
Digital2: S2.6 U1.8 | length 809.2
  Top Layer w30: S2.6 1445,2395 2035,2395 U1.8
Digital2_inv: pad.0 R2A0.2 R2A1.1 R2A2.2 R2A3.1 R2A4.2 R2A5.1 R2A6.2 R2A7.1 R2B0.2 R2B1.1 R2B2.2 R2B3.1 R2B4.2 R2B5.1 R2B6.2 R2B7.1 R2C0.2 R2C1.1 R2C2.2 R2C3.1 R2C4.2 R2C5.1 R2C6.2 R2C7.1 R2D0.2 R2D1.1 R2D2.2 R2D3.1 R2D4.2 R2D5.1 R2D6.2 R2D7.1 U1.9 | length 10531.6
  Top Layer w30: U1.9 3765,945 pad.0 5655,1080 5655,1140 ; R2D6.2 5615,1180 5655,1140 ; R2D4.2 5610,1335 5655,1290 ; R2D2.2 5600,1485 5655,1430 ; R2D0.2 5600,1630 5655,1575 ; R2C6.2 5600,1785 5655,1730 ; R2C4.2 5595,1950 5655,1890 ; R2C2.2 5600,2110 5655,2055 ; R2C0.2 5605,2270 5655,2220 ; R2B6.2 5580,2430 5655,2355 ; R2B4.2 5605,2590 5655,2540 ; R2B2.2 5600,2755 5655,2700 ; R2B0.2 5595,2915 5655,2855 ; R2A6.2 5595,3075 5655,3015 ; R2A4.2 5615,3235 5655,3195 ; R2A2.2 5593.15,3385 5655,3323.15 ; R2A0.2 5605,3535 5655,3485 ; R2D7.1 5695,1180 5655,1140 ; R2D5.1 5700,1335 5655,1290 ; R2D3.1 5710,1485 5655,1430 ; R2D1.1 5710,1630 5655,1575 ; R2C7.1 5710,1785 5655,1730 ; R2C5.1 5715,1950 5655,1890 ; R2C3.1 5710,2110 5655,2055 ; R2C1.1 5705,2270 5655,2220 ; R2B7.1 5730,2430 5655,2355 ; R2B5.1 5705,2590 5655,2540 ; R2B3.1 5705,2750 5655,2700 ; R2B1.1 5715,2915 5655,2855 ; R2A7.1 5715,3075 5655,3015 ; R2A5.1 5725,3235 5670,3180 5655,3195 ; R2A3.1 5670,3308.15 ; R2A1.1 5705,3535 5655,3485 ; 5655,1140 5655,1290 ; 5655,1290 5655,1430 ; 5655,1430 5655,1575 ; 5655,1575 5655,1730 ; 5655,1730 5655,1890 ; 5655,1890 5655,2055 ; 5655,2055 5655,2220 ; 5655,2220 5655,2355 ; 5655,2355 5655,2540 ; 5655,2540 5655,2700 ; 5655,2700 5655,2855 ; 5655,2855 5655,3015 ; 5655,3015 5655,3195 ; 5655,3195 5655,3293.15 ; 5655,3293.15 5655,3323.15 ; 5655,3293.15 5670,3308.15 ; 5655,3323.15 5670,3308.15 ; 5655,3323.15 5655,3485
Digital2_LED: U1.10 U2.4 | length 1182.8
  Bottom Layer w30: U1.10 2345,2905 2345,3566.22 U2.4
GND: C1.2 C2.2 C3.1 C4.1 C5.1 C6.2 C7.1 D3.2 D4.2 D5.1 D6.1 D7.1 P1.2 P2.2 P3.A5 P3.A6 P3.A7 P3.A10 P3.A13 P3.A16 P3.A19 P3.A22 P3.A25 P3.A28 P3.A31 P3.C5 P3.C6 P3.C7 P3.C10 P3.C13 P3.C16 P3.C19 P3.C22 P3.C25 P3.C28 P3.C31 R1.1 R2.1 S3.2 S4.2 U1.7 | length 7.1
  Top Layer w40: S4.2 S4.2@1285,1865
  other v1: 4550,1060 4175,1065 5030,1070 3345,1155 3655,1245 3090,1370 3390,1475 2965,1510 5230,1515 3270,1645 2770,1655 1585,1690 5235,1795 1825,1835 2625,1835 3060,1860 2455,2020 2750,2105 1395,2145 2185,2325 5240,2330 2550,2360 1995,2505 5210,2725 5235,3225 2045,3370 5230,3500 5085,3715 4620,3735 5905,3735 4075,3740 5540,3740 3110,3760 3590,3760 1615,4045 3090,4290 3580,4290 4640,4310 5205,4310 5460,4310 4035,4320 1930,4400 1600,4410
NetC3_2: C3.2 R6.2 U1.1 | length 1007.8
  Bottom Layer w30: C3.2 R6.2 1690,3775 1805,3660 1805,3105 U1.1
NetC4_2: C4.2 R8.2 U1.3 | length 1218.1
  Bottom Layer w40: R8.2@1553.15,1865 R8.2 1553.15,1955 1568.15,1970 1630,1970 1884.53,2224.53 1884.53,2825.47 U1.3
NetD1_1: D1.1 S1.2 | length 403.8
  Top Layer w30: D1.1@1150,4200 D1.1 1150,4420 S1.2
NetD1_3: D1.3 S1.3 | length 447.4
  Bottom Layer w30: D1.3@1150,4000 1332.56,4182.56 1332.56,4246.77 1280,4299.33 S1.3
NetD2_1: D2.1 S2.2 | length 403.8
  Bottom Layer w40: D2.1@1150,2310 D2.1 1150,2530 S2.2
NetD2_3: D2.3 S2.3 | length 403.8
  Top Layer w40: D2.3@1150,2110 1150,2120 1280,2250 S2.3
NetD3_1: D3.1 R5.1 | length 202.9
  Bottom Layer w30: D3.1 1256.42,3525 R5.1
NetD4_1: D4.1 R7.1 | length 268.9
  Bottom Layer w30: D4.1 1395,1540 R7.1
NetP1_1: P1.1 R3.1 | length 271.2
  Bottom Layer w30: P1.1@1300,3085 1315,3070 1393.15,3070 1470,3146.85 R3.1@1470,3210
NetP2_1: P2.1 R4.1 | length 315.6
  Bottom Layer w30: P2.1@1300,1195 1310,1185 1396.85,1185 1500,1288.15 R4.1
NetR1_2: R1.2 S1.1 | length 270.6
  Top Layer w30: R1.2@1280,4225 1280,4240 1225,4295 1225,4372.78 1280,4427.78 S1.1
NetR2_2: R2.2 S2.1 | length 329.4
  Top Layer w20: S2.1 1330,2510 1330,2315 R2.2@1375,2270
NetR5_2: R5.2 U2.8 | length 1029.8
  Top Layer w30: R5.2 1880,3525 2065,3710 2065,4090 2030,4125 1975,4125 v1(1945,4095)
  Bottom Layer w30: v1(1945,4095) 1945,4030 U2.8
NetR6_1: R6.1 R11.1 S3.3 | length 254.5
  Bottom Layer w30: S3.3 R11.1 1416.85,3661.85 R6.1
NetR7_2: R7.2 U2.6 | length 2730.5
  Top Layer w30: v1(1630,2100) 1630,1755 R7.2 ; v1(1725,2780) 1550,2955 1550,3610 1755,3815 v1(1860,3815)
  Bottom Layer w30: v1(1630,2100) 1630,2350 1725,2445 v1(1725,2780) ; v1(1860,3815) U2.6
NetR8_1: R8.1 R12.1 S4.3 | length 253.4
  Bottom Layer w30: S4.3 1298.15,1788.15 R12.1 1446.85,1810 R8.1
NetR9_2: R9.2 U2.1 | length 90.6
  Bottom Layer w30: U2.1 R9.2
NetR10_2: R10.2 U2.3 | length 90.6
  Bottom Layer w30: U2.3 R10.2
OUTPUT1: C1.1 D6.2 R3.2 S1.4 U1.13 | length 2122.9
  Top Layer w30: D6.2 1845.24,3279.76 v1(1915,3210)
  Bottom Layer w30: S1.4 1470,4360 R3.2 ; R3.2@1470,3316.3 R3.2 ; D6.2 1661.61,3318.15 C1.1 R3.2 ; v1(1915,3210) 2077.11,3210 2179.53,3107.59 2179.53,3062.41 2125,3007.89 U1.13 U1.13@2125,2975
OUTPUT2: C2.1 D7.2 R4.2 S2.4 U1.11 | length 2279.8
  Top Layer w20: S2.4 1779.96,2560 1804.49,2535.47 1875.47,2535.47 U1.11
  Bottom Layer w30: S2.4 1500,2440 R4.2 C2.1 1741.61,1463.15 D7.2@1765,1439.76
OVERRIDE1: S1.5 U1.2 | length 1932.2
  Bottom Layer w30: S1.5 1630,4550 1775,4405 1775,3746.57 1845,3676.57 1845,3159.41 1879.53,3124.88 1879.53,3045.12 U1.2@1827.21,2992.79
OVERRIDE2: S2.5 U1.4 | length 550.6
  Bottom Layer w30: S2.5 1570,2850 1760,2850 U1.4
pads on no net: P3.A3 P3.A4 P3.A8 P3.C3 P3.C4 P3.C8 S1.M S2.M S3.1 S3.M S4.1 S4.M
copper on no net: | length 5
  Top Layer w10: 1875,0 1880,0

## Polygon pours and split planes (outlines as drawn)
GND on Bottom Layer "BottomLayer_GND" (solid, remove dead copper, pour order 4): 846.46,846.46 7047.24,846.46 7047.24,4665.35 846.46,4665.35
GND on Top Layer "TopLayer_GND" (solid, remove dead copper, pour order 3): 846.46,846.46 846.46,4665.35 7047.24,4665.35 7047.24,846.46

## Silkscreen, mask and mechanical layers (free items; w line width, h text height)
Top Overlay:
  lines w10: 846.46,846.46 846.46,4665.35 7047.24,4665.35 7047.24,846.46 846.46,846.46
Mechanical 1:
  the board outline again, w10

## Text inside footprints (layer, text, board x,y; h text height)
C6: Top Overlay "+" at 2600,4090 h40 r90
D1: Top Overlay "G" at 1060,4025 h40 r270; Top Overlay "R" at 1055,4225 h40 r270; Top Overlay "+" at 1055,4130 h40 r270
D2: Top Overlay "G" at 1060,2135 h40 r270; Top Overlay "R" at 1055,2335 h40 r270; Top Overlay "+" at 1055,2240 h40 r270
D3: Top Overlay "-" at 1231.42,3550 h40 r180; Top Overlay "+" at 1231.42,3450 h40 r180
D4: Top Overlay "-" at 1231.42,1660 h40 r180; Top Overlay "+" at 1231.42,1560 h40 r180
P3: Top Overlay "1" at 6670.08,4315.75 h40 r270; Top Overlay "a" at 6956.69,4392.91 h40 r270; Top Overlay "c" at 6756.69,4392.91 h40 r270; Top Overlay "32" at 6670.08,1255.12 h40 r270; Top Overlay "11" at 6670.08,3340.35 h40 r270; Top Overlay "21" at 6670.08,2355.12 h40 r270; Mechanical 1 "PCB Edge" at 7204.72,4585.43 h40 r270